# Altium PCB BattleBoardRev3.PcbDoc
Units mm, origin at the board's own origin, x right, y up, seen from the top; angles counter-clockwise.
Board outline 50 x 50 mm, 2 copper layers (Top Layer, Bottom Layer); 8 components, 14 nets, 32 pads, 0 vias.
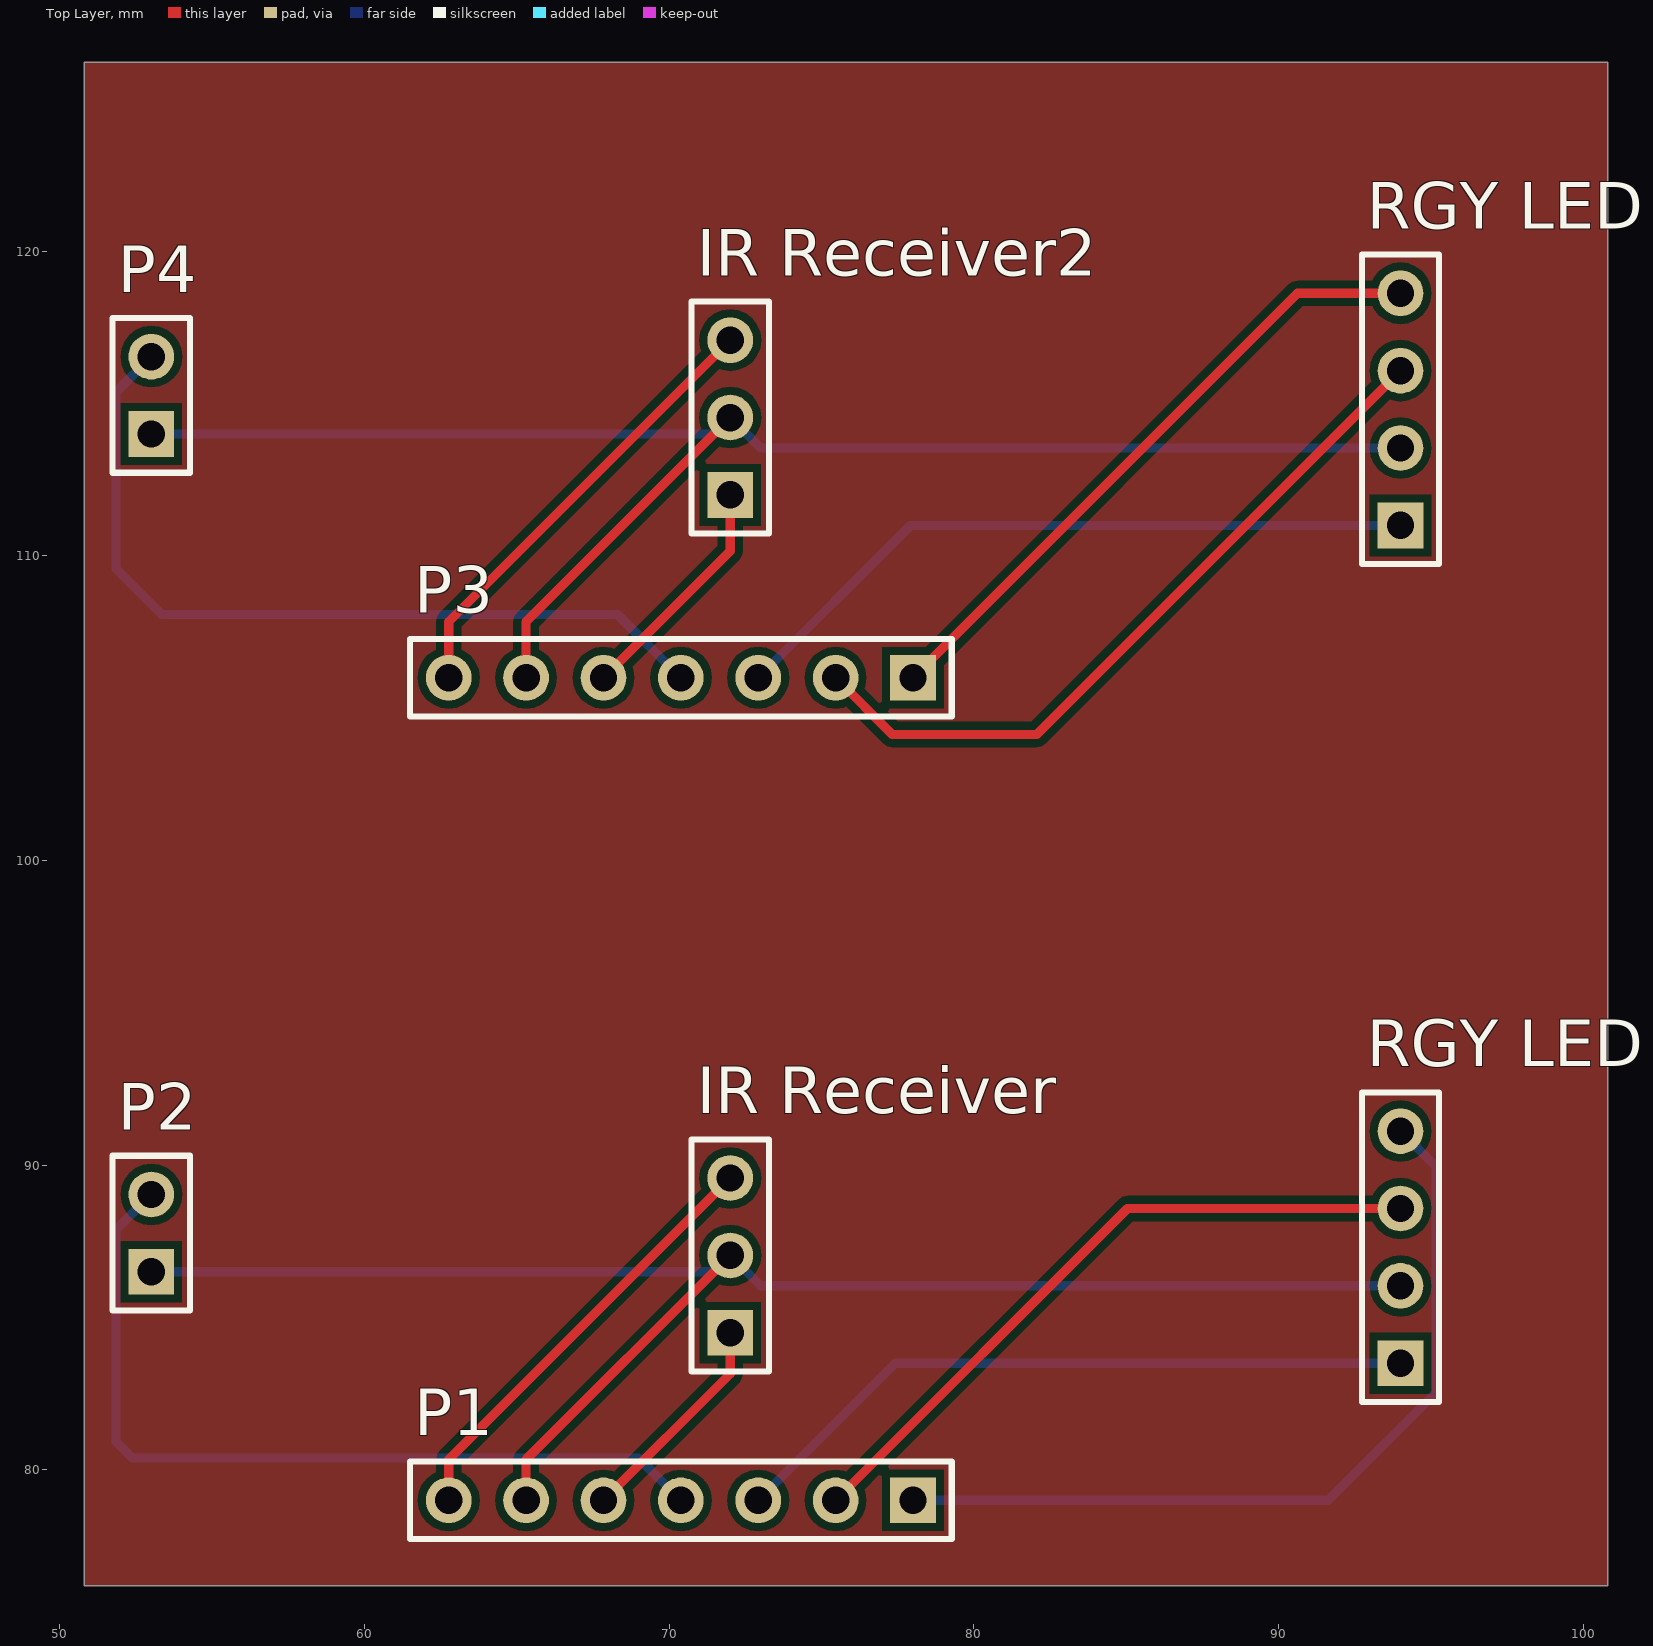
[diagram p0: Top Layer view]
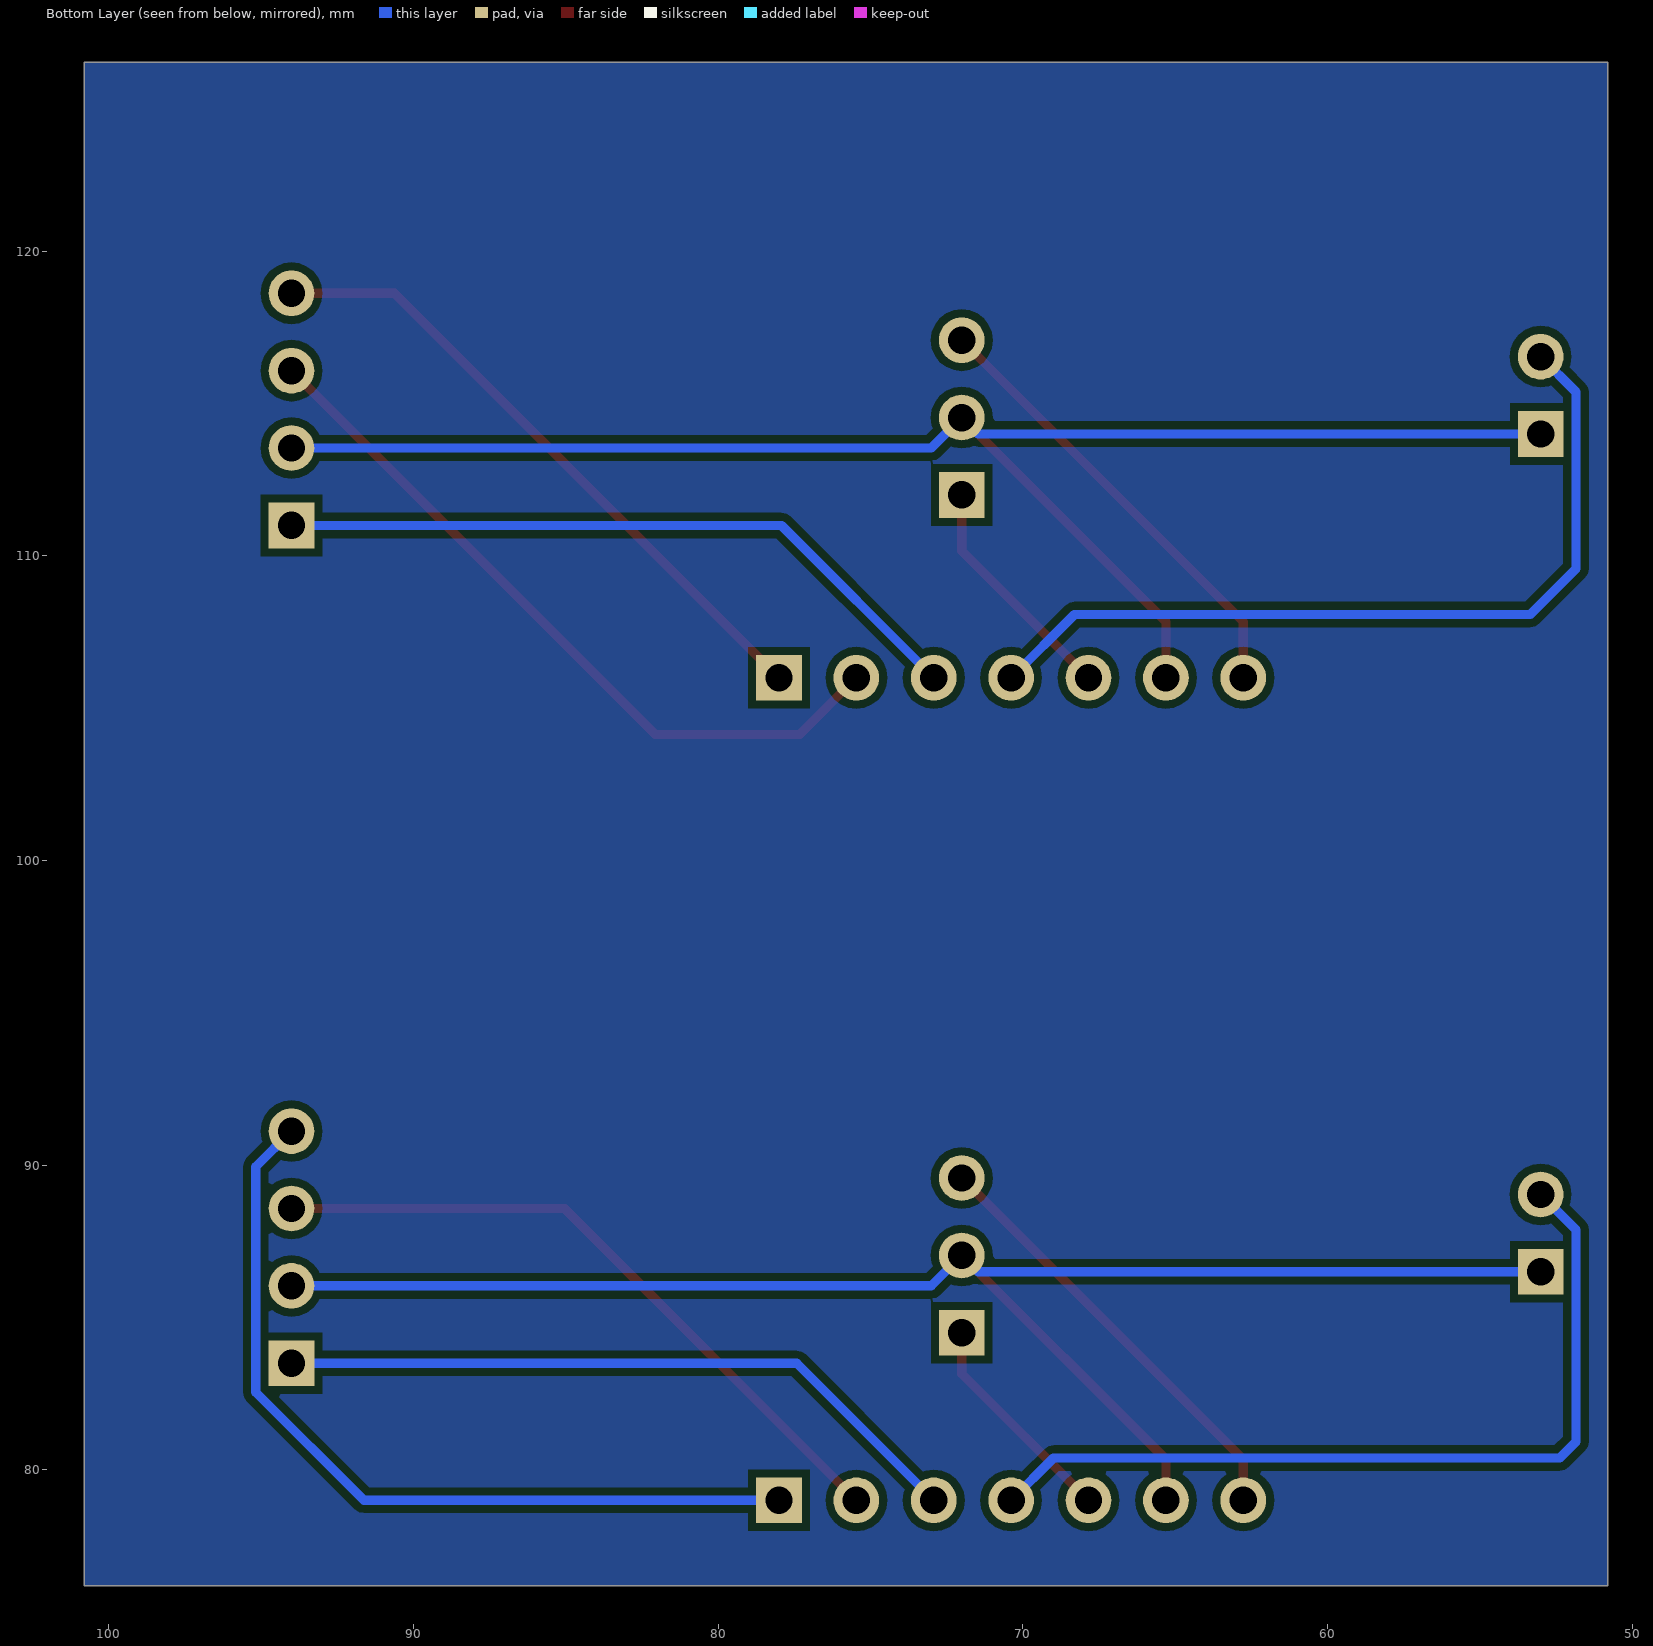
[diagram p1: Bottom Layer view, seen from below]

## Layer stack, top to bottom
Top Solder: solder mask 0.0102, Solder Resist, Dk 3.5
Top Layer: signal copper 0.0356
Dielectric 1: dielectric 0.32, FR-4, Dk 4.8
Bottom Layer: signal copper 0.0356
Bottom Solder: solder mask 0.0102, Solder Resist, Dk 3.5

## Board outline
50.8,76.2 100.8,76.2 100.8,126.2 50.8,126.2

## Design rules (kind name [scope] priority, off if disabled: settings)
Clearance [All] p1: gap=0.254
HoleSize [All] p1: absolutevalues=TRUE maxlimit=1 minlimit=1 maxpercent=80.000 minpercent=20.000
MinimumAnnularRing [All] p1: minimumring=0.254
PolygonConnect [All] p1: connectstyle=Relief reliefconductorwidth=0.254 reliefentries=4 polygonreliefangle="90 Angle" airgapwidth=0.254
RoutingVias [All] p1: holewidth=0.6 width=1.1 viastyle="Through Hole" minholewidth=0.711 minwidth=1.27 maxholewidth=0.711 maxwidth=1.27
SolderMaskExpansion [All] p1: expansion=0.102
Width [All] p1: maxlimit=0.305 minlimit=0.305 preferedwidth=0.305
29 further rules are at their usual default settings.

## Components (designator, comment, footprint, x,y, rotation, side; value= is the part's Value field where it differs from the comment)
"IR Receiver" "Header 3" HDR1X3 72,84.5 r90 top
"IR Receiver2" "Header 3" HDR1X3 72,112 r90 top
P1 "Header 7" HDR1X7 78,79 r180 top
P2 "IR Transmitter" HDR1X2 53,86.5 r90 top
P3 "Header 7" HDR1X7 78,106 r180 top
P4 "IR Transmitter" HDR1X2 53,114 r90 top
"RGY LED" "Header 4" HDR1X4 94,83.5 r90 top
"RGY LED2" "Header 4" HDR1X4 94,111 r90 top

## Footprints (in the part's own frame and the unit in brackets; to place one, negate y for a bottom-side part, rotate by r counter-clockwise, add the part's x,y. Pads: shape width x height; smd on the part's side, far side on the other; paste and mask are expansions set on the pad)
HDR1X2 [mm] "Connector; Header; 2 Position"
  rect 1.5x1.5 hole 0.9: 1(0,0)
  round 1.5 hole 0.9: 2(2.54,0)
  silkscreen extent -1.27,-1.27 3.81,1.27
HDR1X3 [mm] "Connector; Header; 3 Position"
  rect 1.5x1.5 hole 0.9: 1(0,0)
  round 1.5 hole 0.9: 2(2.54,0) 3(5.08,0)
  silkscreen extent -1.27,-1.27 6.35,1.27
HDR1X4 [mm] "Connector; Header; 4 Position"
  rect 1.5x1.5 hole 0.9: 1(0,0)
  round 1.5 hole 0.9: 2(2.54,0) 3(5.08,0) 4(7.62,0)
  silkscreen extent -1.27,-1.27 8.89,1.27
HDR1X7 [mm] "Connector; Header; 7 Position"
  rect 1.5x1.5 hole 0.9: 1(0,0)
  round 1.5 hole 0.9: 2(2.54,0) 3(5.08,0) 4(7.62,0) 5(10.16,0) 6(12.7,0) 7(15.24,0)
  silkscreen extent -1.27,-1.27 16.51,1.27

## Part data
"IR Receiver" "IR Receiver2": "Header, 3-Pin"
P1 P3: "Header, 7-Pin"
P2 P4: library part "Header 2", "Header, 2-Pin"
"RGY LED" "RGY LED2": "Header, 4-Pin"

## Nets (pads, with @x,y where several pads share a name; then routed paths per layer and width w, separated by ;. In a path a pad name is that pad's centre, name@x,y a point inside that pad or via, vN(x,y) a via of type N, cw(c..) or ccw(c..) an arc to the next point about the centre after c; other vN are vias at no path point)
"NetIR Receiver2_1": "IR Receiver2.1" P3.5 | length 7.7
  Top Layer w0.305: P3.5 72,110.16 72,112
"NetIR Receiver2_2": "IR Receiver2.2" "RGY LED2.2" P3.6 P4.1 | length 53
  Top Layer w0.305: P3.6 65.3,107.84 72,114.54
  Bottom Layer w0.305: P4.1 71.46,114 72,114.54 73,113.54 94,113.54
"NetIR Receiver2_3": "IR Receiver2.3" P3.7 | length 14.9
  Top Layer w0.305: P3.7 62.76,107.84 72,117.08
"NetIR Receiver_1": "IR Receiver.1" P1.5 | length 7.2
  Top Layer w0.305: P1.5 72,83.16 72,84.5
"NetIR Receiver_2": "IR Receiver.2" "RGY LED.2" P1.6 P2.1 | length 52.5
  Top Layer w0.305: P1.6 65.3,80.34 72,87.04
  Bottom Layer w0.305: P2.1 71.46,86.5 72,87.04 73,86.04 94,86.04
"NetIR Receiver_3": "IR Receiver.3" P1.7 | length 14.4
  Top Layer w0.305: P1.7 62.76,80.34 72,89.58
NetP1_1: "RGY LED.4" P1.1 | length 27.7
  Bottom Layer w0.305: P1.1 91.624,79 95.174,82.55 95.174,89.946 94,91.12
NetP1_2: "RGY LED.3" P1.2 | length 22.5
  Top Layer w0.305: P1.2 85.04,88.58 94,88.58
NetP1_3: "RGY LED.1" P1.3 | length 22.9
  Bottom Layer w0.305: P1.3 77.42,83.5 94,83.5
NetP1_4: P1.4 P2.2 | length 27.9
  Bottom Layer w0.305: P2.2 51.841,87.881 51.841,80.924 52.375,80.391 68.989,80.391 P1.4
NetP3_1: "RGY LED2.4" P3.1 | length 21.2
  Top Layer w0.305: P3.1 90.62,118.62 94,118.62
NetP3_2: "RGY LED2.3" P3.2 | length 24.3
  Top Layer w0.305: P3.2 77.32,104.14 82.06,104.14 94,116.08
NetP3_3: "RGY LED2.1" P3.3 | length 23.2
  Bottom Layer w0.305: P3.3 77.92,111 94,111
NetP3_4: P3.4 P4.2 | length 27.5
  Bottom Layer w0.305: P4.2 51.841,115.381 51.841,109.576 53.34,108.077 68.303,108.077 P3.4

## Polygon pours and split planes (outlines as drawn)
no net on Top Layer "Top-Layer" (solid, pour order 6): 50.8,126.2 50.8,76.2 100.8,76.2 100.8,126.2
no net on Bottom Layer "Top-Layer" (solid, pour order 8): 50.8,126.2 50.8,76.2 100.8,76.2 100.8,126.2